# Altium PCB PCB.PcbDoc (part 4 of 4)
Units mm, origin at the board's own origin, x right, y up, seen from the top; angles counter-clockwise.
Board outline 86.25 x 140 mm, 4 copper layers (Top Layer, GND, PWR, Bottom Layer), stack 1.57 mm thick; 308 components, 255 nets, 1064 pads, 1223 vias.
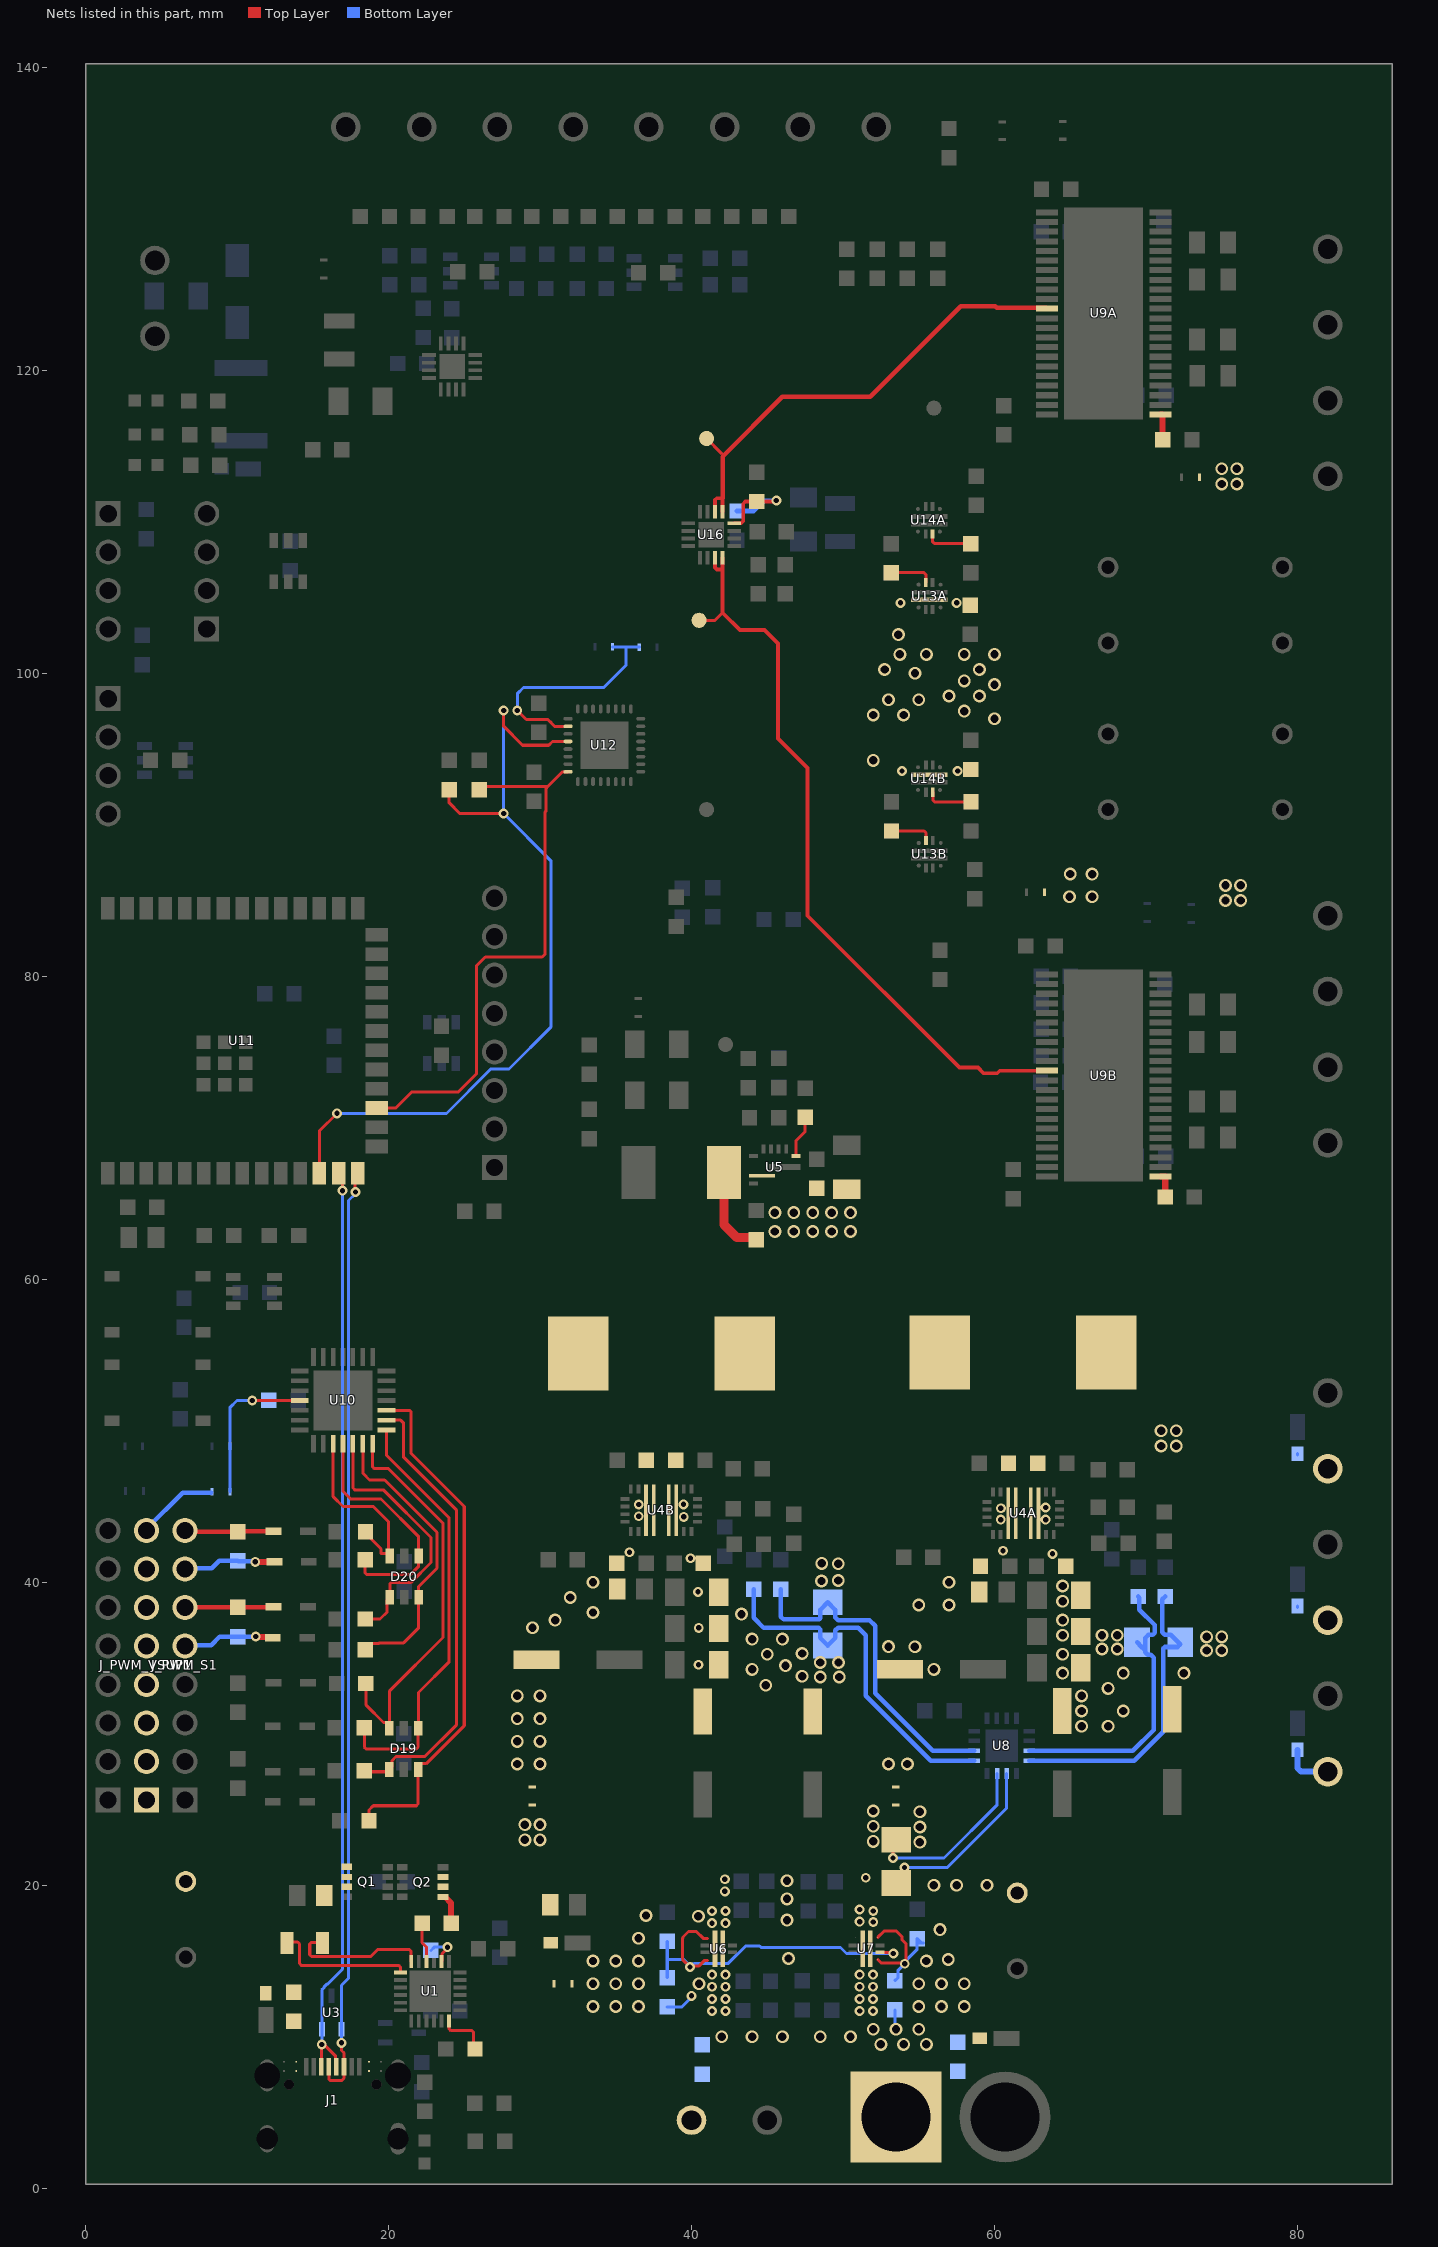
[diagram p6: the nets of this part, all layers, seen from the top]

## Via types
v1: diameter 0.85, hole 0.55, Top Layer to Bottom Layer, tented both sides, 772 vias
v2: diameter 0.65, hole 0.35, Top Layer to Bottom Layer, tented both sides, 362 vias
v3: diameter 0.65, hole 0.35, Top Layer to Bottom Layer, tented bottom, 26 vias
v4: diameter 0.7, hole 0.4, Top Layer to Bottom Layer, tented both sides, 25 vias
v5: diameter 0.65, hole 0.35, Top Layer to Bottom Layer, tented top, 19 vias
v6: diameter 0.85, hole 0.55, Top Layer to Bottom Layer, tented bottom, 14 vias
v7: diameter 5, hole 4.5, Top Layer to Bottom Layer, 4 vias
v8: diameter 0.8, hole 0.5, Top Layer to Bottom Layer, tented both sides, 1 vias

## Nets (pads, with @x,y where several pads share a name; then routed paths per layer and width w, separated by ;. In a path a pad name is that pad's centre, name@x,y a point inside that pad or via, vN(x,y) a via of type N, cw(c..) or ccw(c..) an arc to the next point about the centre after c; other vN are vias at no path point) (continued)
PWM_ETX_4: D14.K J_PWM_S1.5 R41.2 | length 6.1
  Top Layer w0.4: v2(11.232,36.418) 11.266,36.384 12.328,36.384 D14.K@12.362,36.35
  Bottom Layer w0.3: J_PWM_S1.5@6.54,35.84 8.29,35.84 8.868,36.418 R41.2@10.04,36.418 v2(11.232,36.418)
PWM_ETX_5: D13.K J_PWM_S1.6 R40.2 | length 5.9
  Top Layer w0.3: J_PWM_S1.6@6.552,38.342 12.364,38.342 D13.K@12.402,38.38
PWM_ETX_6: D12.K J_PWM_S1.7 R39.2 | length 6.2
  Top Layer w0.4: v2(11.2,41.35) D12.K@12.462,41.35
  Bottom Layer w0.3: J_PWM_S1.7@6.54,40.92 8.33,40.92 8.828,41.418 R39.2@10.04,41.418 10.074,41.384 11.166,41.384 v2(11.2,41.35)
PWM_ETX_7: D11.K J_PWM_S1.8 R38.2 | length 5.9
  Top Layer w0.3: J_PWM_S1.8@6.54,43.46 6.658,43.342 10.021,43.342 10.04,43.361 D11.K@12.402,43.361
PWM_PROT_0: D19.3 R37.1 U10.10 | length 34.6
  Top Layer w0.2: R37.1@18.712,24.25 18.712,24.962 19,25.25 21.833,25.25 21.95,25.367 21.95,27.845 22.129,28.024 22.489,28.024 25,30.534 25,45 21.5,48.5 21.5,51.233 21.383,51.35 U10.10@19.867,51.35
PWM_PROT_1: D19.1 R36.1 U10.9 | length 30.2
  Top Layer w0.2: R36.1@18.391,27.548 18.446,27.493 18.727,27.493 19.905,27.493 20.229,27.817 20.229,28.229 20.5,28.5 22.4,28.5 24.5,30.6 24.5,44.75 21,48.25 21,50.5 20.8,50.7 U10.9@19.867,50.7
PWM_PROT_2: D19.4 R35.1 U10.8 | length 28.4
  Top Layer w0.2: R35.1@18.404,30.407 18.404,29.117 18.521,29 21.833,29 21.95,29.117 21.95,30.57 21.979,30.599 21.979,32.729 24,34.75 24,44.25 19.867,48.383 U10.8@19.867,50.05
PWM_PROT_3: D19.6 R34.1 U10.7 | length 26.2
  Top Layer w0.2: R34.1@18.506,33.322 18.526,33.302 18.526,31.887 19.664,30.749 19.871,30.749 D19.6@20.05,30.57 ; U10.7@18.95,49.133 18.95,47.617 19.067,47.5 20,47.5 23.6,43.9 23.6,36.35 20.05,32.8 D19.6@20.05,30.57 ; D19.6@20.05,30.362 D19.6@20.05,30.57
PWM_PROT_4: D20.6 R33.1 U10.6 | length 19.4
  Top Layer w0.2: U10.6@18.3,49.133 18.326,49.107 18.326,47.174 18.75,46.75 19.75,46.75 23.2,43.3 23.2,40.929 21.99,39.719 D20.6@21.99,39.018 21.99,36.99 21,36 19.642,36 19.641,35.998 19.373,35.998 19.323,35.948 18.873,35.948 R33.1@18.465,35.54
PWM_PROT_5: D20.4 R32.1 U10.5 | length 17.9
  Top Layer w0.2: U10.5@17.65,49.133 17.65,46.217 17.767,46.1 19.662,46.1 22.8,42.962 22.8,41.3 21.5,40 20.207,40 20.09,39.883 D20.4@20.09,39.018 19.911,38.839 19.911,38.044 19.441,37.573 R32.1@18.469,37.573
PWM_PROT_6: D20.1 R31.1 U10.4 | length 16
  Top Layer w0.2: U10.4@17,49.133 17,46 17.5,45.5 19.5,45.5 21.99,43.01 21.99,41.056 21.434,40.5 18.58,40.5 18.462,40.617 R31.1@18.462,41.5
PWM_PROT_7: D20.3 R30.1 U10.3 | length 12.4
  Top Layer w0.2: U10.3@16.35,49.133 16.35,45.65 17,45 19,45 20,44 20,41.832 19.932,41.9 19.5,41.9 19.5,42.211 18.424,43.287 R30.1@18.479,43.342
R_LMA_IMONA: R55A.1 U13A.9 | length 2.8
  Top Layer w0.2: R55A.1@53.19,106.638 55.348,106.638 55.465,106.52 U13A.9@55.465,106
R_LMA_IMONB: R55B.1 U13B.9 | length 2.8
  Top Layer w0.2: R55B.1@53.2,89.588 55.358,89.588 55.475,89.47 U13B.9@55.475,88.95
R_LMB_IMONA: R56A.1 U14A.9 | length 3.1
  Top Layer w0.2: U14A.9@55.915,109.2 55.915,108.68 56.032,108.562 R56A.1@58.44,108.562
R_LMB_IMONB: R56B.1 U14B.9 | length 3.1
  Top Layer w0.2: U14B.9@55.925,92.15 55.925,91.63 56.042,91.512 R56B.1@58.45,91.512
R_MODE: R13.2 U5.10 | length 2.8
  Top Layer w0.2: U5.10@46.9,68.13 46.9,69.15 47.5,69.75 R13.2@47.5,70.688
REG5_R_SENS+: C12B.2 C13B.2 C14B.2 C15B.2 C16B.1 C17B.1 R8B.1 R_S1B.1 U4B.11 U8.1 | length 24.3
  Bottom Layer w0.3: R8B.1@44.1,39.55 44.1,37.65 44.766,36.984 48.399,36.984 48.5,36.883 48.5,36.325 R_S1B.1@49,35.825 49.5,36.325 49.5,36.824 49.676,37 51,37 51.5,36.5 51.5,32.517 55.787,28.229 U8.1@58.654,28.229
  other v1: 44.9,33.2 48.5,33.75 49.75,33.75 47.3,33.8 44,34.25 46.2,34.5 48.5,34.7 49.7,34.7 45,35.25 47.3,35.3 44,36.25 46,36.25 43.3,37.9
  other v2: 40.465,34.558 40.477,36.994 40.429,39.368 39.929,41.585 39.486,44.316 39.468,45.145
REG_R_SENS+: C12A.2 C13A.2 C14A.2 C15A.2 C16A.1 C17A.1 R8A.1 R_S1A.1 U4A.11 U8.11 | length 20.2
  Bottom Layer w0.3: U8.11@62.304,28.879 69.129,28.879 70.5,30.25 70.5,35.032 70.324,35.208 70.112,35.208 69.945,35.375 R_S1A.1@69.945,35.75 ; R_S1A.1@69.412,36.033 69.695,35.75 R_S1A.1@69.945,35.75 ; R8A.1@69.494,39.061 69.563,38.992 69.563,38.187 70.57,37.18 70.57,36.656 70.453,36.539 70.162,36.539 69.945,36.322 R_S1A.1@69.945,35.75 ; R_S1A.1@69.628,35.817 69.945,35.5 R_S1A.1@69.945,35.75
  other v1: 65.75,30.5 67.5,30.5 65.75,31.5 68.5,31.5 65.75,32.5 67.5,33 64.5,34 68.5,34 72.5,34 64.5,35.25 67.1,35.6 68.1,35.6 64.5,36.5 67.1,36.5 68.1,36.5 64.5,37.5 64.5,38.75 64.5,39.75
  other v2: 63.834,41.875 63.376,44.137 63.376,44.938
SW: C19.1 L_1.1 U5.6 | length 6
  Top Layer w0.6: L_1.1@42.144,67.05 42.144,63.606 43.001,62.749 44.15,62.749 C19.1@44.284,62.616
SW1A: C6A.2 L1A.1 U4A.8
SW1B: C6B.2 L1B.1 U4B.8
SW2A: C7A.2 L1A.2 U4A.10
SW2B: C7B.2 L1B.2 U4B.10
TC_ADDR: JP3.1 JP4.1 U12.26 | length 15.8
  Top Layer w0.2: v2(28.5,97.55) 29.1,96.95 30.516,96.95 30.734,96.732 30.734,96.716 30.95,96.5 U12.26@31.85,96.5
  Bottom Layer w0.2: v2(28.5,97.55) 28.5,98.65 28.914,99.064 34.214,99.064 35.675,100.525 35.675,101.75 ; JP4.1@34.8,101.75 35.675,101.75 ; JP3.1@36.55,101.725 36.55,101.75 35.675,101.75
TCA6424_nINT: R53.1 U11.17 U12.32 | length 37
  Top Layer w0.2: U11.17@19.225,71.305 20.48,71.305 21.55,72.375 24.625,72.375 25.8,73.55 25.8,80.675 26.392,81.267 30.142,81.267 30.343,81.468 30.343,90.853 30.408,90.918 30.408,92.415 30.518,92.525 ; R53.1@26,92.325 26.2,92.525 30.518,92.525 ; U12.32@31.85,93.5 31.842,93.492 31.486,93.492 30.518,92.525
TCA6424_nRESET: R54.1 U11.12 U12.28 | length 53.8
  Top Layer w0.2: U11.12@15.435,67 15.435,69.785 v2(16.6,70.95) ; R54.1@24,92.325 24,91.45 24.7,90.75 v2(27.6,90.75) ; v2(27.6,97.55) 27.6,96.501 28.851,95.25 30.574,95.25 30.824,95.5 U12.28@31.85,95.5
  Bottom Layer w0.2: v2(16.6,70.95) 23.825,70.95 26.749,73.875 27.95,73.875 30.714,76.639 30.714,87.636 v2(27.6,90.75) v2(27.6,97.55)
TPS_EXT_EN: R19.1 R21.2 U7.1 U7.4 | length 10.1
  Top Layer w0.2: U7.1@52.3,15.1 52.525,14.875 54.025,14.875 v3(54.075,14.825) 54.152,14.902 54.152,16.148 53.897,16.403 53.897,16.607 53.531,16.973 52.709,16.973 52.3,16.565 U7.4@52.3,16.55
  Bottom Layer w0.2: R19.1@53.425,13.7 53.641,13.916 53.641,14.391 v3(54.075,14.825) 54.075,14.947 54.899,15.771 R21.2@54.899,16.18 ; R21.2@54.899,16.18 R21.2@54.899,16.483 R21.2@55.203,16.18 ; R21.2@54.899,16.18 R21.2@55.203,16.18 ; R21.2@55.203,16.18 55.309,16.18 R21.2@55.203,16.18
USB_D_N: J1.A7 J1.B7 U3.2 U11.13 | length 61.6
  Top Layer w0.2: J1.B7@15.563,8.027 15.592,8.057 v2(15.592,9.492) 15.679,9.406 15.831,9.406 16.515,8.723 16.515,8.075 J1.A7@16.563,8.027 ; U11.13@16.705,67 16.964,66.741 v2(16.964,65.851)
  Bottom Layer w0.2: v2(15.592,9.492) 15.596,9.496 U3.2@15.596,10.5 ; U3.2@15.6,10.5 15.6,13.1 15.75,13.25 15.75,13.299 15.926,13.475 15.975,13.475 16.964,14.464 v2(16.964,65.851)
USB_D_P: J1.A6 J1.B6 U3.1 U11.14 | length 62.2
  Top Layer w0.2: J1.A6@16.063,8.027 16.063,7.217 16.18,7.1 16.893,7.1 17.063,7.27 J1.B6@17.063,8.027 17.063,8.937 16.9,9.1 v2(16.9,9.6) ; v2@17.798,65.756 17.798,66.823 U11.14@17.975,67
  Bottom Layer w0.2: v2(16.9,9.6) U3.1@16.9,10.5 16.9,13.4 17.364,13.864 17.364,65.2 17.798,65.634 v2@17.798,65.756
  other v2: 17.823,65.756
V5V: C3.2 U1.20 | length 2.3
  Top Layer w0.2: U1.20@23.5,14.965 23.527,14.993 23.527,15.473 23.9,15.846 v2(23.9,15.919)
  Bottom Layer w0.2: C3.2@22.8,15.7 23.019,15.919 v2(23.9,15.919)
V18: C4.2 U1.12 | length 3.4
  Top Layer w0.2: U1.12@24,11.035 24,10.517 24.117,10.4 25.508,10.4 25.625,10.283 25.625,9.278 C4.2@25.707,9.196
V_BUS_OUT: C2.2 D1.K OUT_PD1.1 Q2.1 Q2.2 Q2.3 R1.2 | length 2
  Top Layer w0.4: Q2.1@23.6,19.225 23.74,19.225 24.139,18.826 R1.2@24.139,17.499
V_UVLO: R14.1 R15.2 U6.1 U6.4 U7.2 | length 24.7
  Top Layer w0.2: U6.4@41.05,15.05 40.872,15.05 40.508,14.686 39.986,14.686 v3(39.9,14.6) 39.9,14.614 39.394,15.12 39.394,16.477 39.435,16.518 39.435,16.584 39.801,16.95 40.319,16.95 40.769,16.5 U6.1@41.05,16.5 ; U7.2@52.45,15.575 52.625,15.575 52.65,15.55 53.275,15.55 v2(53.325,15.5)
  Bottom Layer w0.2: R14.1@38.4,13.9 38.4,15.1 ; R15.2@38.4,16.3 38.4,15.1 ; v3(39.9,14.6) 39.9,14.7 39.5,15.1 38.4,15.1 ; v3@39.952,14.648 40.154,14.851 42.434,14.851 43.559,15.977 44.087,15.977 44.099,15.988 44.501,15.988 44.592,15.897 49.831,15.897 50.228,15.5 v2(53.325,15.5)
VBUS: F_USB1.1 J1.A4 J1.A9 J1.B4 J1.B9
VBUS_PROT: D2.K F_USB1.2 R_SUSB1.1 U1.1 | length 9.3
  Top Layer w0.2: R_SUSB1.1@13.3,16.2 13.35,16.25 14.006,16.25 14.124,16.133 14.124,14.832 14.241,14.715 20.668,14.715 20.785,14.598 U1.1@20.785,14.25
VBUS_SEN: C1.1 Q1.1 Q1.2 Q1.3 R_SUSB1.2 U1.24 | length 9.3
  Top Layer w0.2: R_SUSB1.2@15.65,16.2 15.615,16.235 14.919,16.235 14.802,16.118 14.802,15.419 14.919,15.302 18.831,15.302 19.279,15.75 21.383,15.75 21.5,15.633 U1.24@21.5,14.965
VCPA: C33A.1 U9A.1 | length 1.8
  Top Layer w0.4: U9A.1@70.95,117.083 71.075,117.083 71.075,115.461 C33A.1@71.109,115.428
VCPB: C33B.1 U9B.1 | length 1.7
  Top Layer w0.4: U9B.1@70.95,66.783 71.269,66.783 C33B.1@71.269,65.431
VDD: C39.2 PWM_1.2 PWM_REG1.2 U10.25 | length 11.5
  Top Layer w0.2: v2(11.004,52.004) 11.005,52.002 14.131,52.002 U10.25@14.133,52
  Bottom Layer w0.2: PWM_REG1.2@9.525,45.975 9.525,51.525 10.004,52.004 v2(11.004,52.004) C39.2@12.106,52.004
VEXT_PROT: D7.K F_ST1.2 F_XT1.2 R19.2 U7.5 | length 1.3
  Bottom Layer w0.2: v1@53.425,10.5 R19.2@53.425,11.775
  other v1: 52.5,9.5 54,9.5 55.5,9.5 42,10 44,10 46,10 48.5,10 50.5,10 52,10.5 53.5,10.5 55,10.5 55,12 56.5,12 58,12 55,13.5 56.5,13.5 58,13.5 55.5,15 56.95,15.1 56.4,17.075
  other v2: 51.975,11.7 51.975,12.5 51.975,13.3 51.975,14.1 52,17.575 52,18.3
VEXT_SCR: F_ST1.1 J_EXT_2.1
VEXT_XT: F_XT1.1 J_EXT_1.1
VOUT: R1.1 U1.22 | length 2.7
  Top Layer w0.2: R1.1@22.215,17.499 22.215,16.212 22.5,15.927 U1.22@22.5,14.965
VREF: C67.2 R74.1 U16.16 | length 7
  Top Layer w0.25: U16.16@42.821,109.9 42.823,109.903 43.272,109.903 43.419,110.049 43.419,111.191 43.565,111.338 C67.2@44.304,111.338 45.538,111.338 v3(45.6,111.4)
  Bottom Layer w0.3: R74.1@43,110.712 44.112,110.712 44.8,111.4 v3(45.6,111.4)
VREF1: TP2.1 U9A.33 U16.1 U16.2 | length 31.9
  Top Layer w0.2: TP2.1@41,115.5 42,114.5
  Top Layer w0.25: U16.2@41.55,110.671 41.55,111.433 41.667,111.55 42.05,111.55 U16.1@42.05,110.671
  Top Layer w0.3: 42.05,111.55 42.05,114.3 46,118.25 51.8,118.25 57.775,124.225 60.05,124.225 60.157,124.118 63.4,124.118 U9A.33@63.45,124.068
VREF2: TP3.1 U9B.33 U16.11 U16.12 | length 50
  Top Layer w0.2: TP3.1@40.5,103.5 41.55,103.5 42.05,104
  Top Layer w0.25: U16.11@41.55,107.629 41.55,106.982 41.682,106.85 42.05,106.85 ; U16.12@42.05,107.629 42.05,106.85 ; U9B.33@63.45,73.768 60.347,73.768 60.179,73.6 59.279,73.6 58.908,73.971 57.68,73.971 47.652,83.998 47.652,93.75 45.702,95.699 45.702,101.972 44.824,102.85 43.2,102.85 42.05,104 42.05,106.85
VREG: D10.K J_VREG2.1 JP6.1 R9A.1 R_S1A.2 U8.12 | length 20.6
  Bottom Layer w0.2: D10.K@80,38.335 D10.K@80,38.435 ; J_VREG2.1@81.89,37.61 J_VREG2.1@82,37.5
  Bottom Layer w0.3: U8.12@62.304,28.229 69.229,28.229 71.134,30.134 71.134,35.634 71.229,35.729 72.083,35.729 72.262,35.908 71.631,36.539 71.229,36.539 71.072,36.696 71.072,38.868 R9A.1@71.266,39.062
  other v1: 74,35.5 75,35.5 74,36.4 75,36.4 75.25,85 76.25,85 75.25,86 76.25,86 75,112.5 76,112.5 75,113.5 76,113.5
VREG5: C42.1 D8.K J_PWM_VSUP1.1 J_PWM_VSUP1.2 J_PWM_VSUP1.3 J_PWM_VSUP1.4 J_PWM_VSUP1.5 J_PWM_VSUP1.6 J_PWM_VSUP1.7 J_PWM_VSUP1.8 J_VREG1.1 JP7.1 PWM_REG1.1 R9B.1 R_S1B.2 U8.2 | length 28.1
  Bottom Layer w0.2: D8.K@80,48.388 D8.K@80,48.488 ; J_VREG1.1@81.837,47.663 J_VREG1.1@82,47.5
  Bottom Layer w0.3: J_PWM_VSUP1.8@4.022,43.415 4.022,43.522 6.417,45.917 PWM_REG1.1@8.3,45.917 ; R9B.1@45.9,39.55 45.9,37.724 46.076,37.548 48.431,37.548 48.5,37.617 48.5,38.175 R_S1B.2@49,38.675 49.5,38.175 49.5,37.676 49.676,37.5 51.75,37.5 52.125,37.125 52.125,32.666 55.917,28.874 56.9,28.874 56.905,28.879 U8.2@58.654,28.879
  other v1: 48.579,40.08 49.684,40.115 49.685,41.224 48.6,41.25 71,49 72,49 71,50 72,50 64.946,85.246 66.446,85.246 65,86.75 66.446,86.746
VSUP: C21.2 C22.2 C54A.2 C57B.2 D9.K EN_VREG1.1 EN_VREG2.1 J_SUP1.1 R_S2.2 U5.8 U8.15 U13A.5 U14B.5 | length 15
  Top Layer w0.2: v2(53.295,21.8) 53.295,22.795 R_S2.2@53.5,23
  Bottom Layer w0.2: v2(53.295,21.8) 56.669,21.8 60.179,25.31 U8.15@60.179,27.379
  Bottom Layer w0.4: D9.K@80,28.935 80,27.734 80.234,27.5 J_SUP1.1@82,27.5
  other v1: 55.075,22.85 52,22.9 29,23 30,23 55.075,23.85 52,23.9 29,24 30,24 55.075,24.85 52,24.9 45.5,63.15 46.75,63.15 48,63.15 49.25,63.15 50.5,63.15 45.5,64.4 46.75,64.4 48,64.4 49.25,64.4 50.5,64.4 52,94.25 60,97 52,97.25 54,97.25 58,97.5 53,98.25 55,98.25 57,98.5 59,98.5 60,99.25 58,99.5 54.75,100 52.75,100.25 59,100.25 53.75,101.25 55.5,101.25 58,101.25 60,101.25 53.652,102.552
  other v2: 53.891,93.545 57.566,93.545 53.8,104.65 57.5,104.65
VSUP_SENS+: C25.1 R_S2.1 U6.6 U7.6 U8.14 | length 11.9
  Top Layer w0.2: R_S2.1@53.5,20.15 54.058,20.708 v2(54.058,21.175)
  Bottom Layer w0.2: v2(54.058,21.175) 56.881,21.175 60.804,25.098 U8.14@60.804,27.379
  other v1: 46.4,15.172 46.3,17.7 46.3,19.1 56,20 57.5,20 59.5,20 46.3,20.3
  other v2: 42.25,11.7 51.1,11.7 42.25,12.5 51.1,12.5 42.25,13.3 51.1,13.3 42.25,14.1 51.1,14.1 42.25,17.5 51.1,17.6 42.25,18.3 51.1,18.4 42.2,19.6 42.2,20.4 51.5,20.5
VSUPA: C8A.1 C9A.2 C10A.2 EN_VREG1.2 U4A.7
  other v1: 53,28 54.25,28 56,34.25 53,35.75 54.746,35.746 55,38.5 57,38.5 57,40
  other v2: 60.56,42.083 60.41,44.137 60.419,44.884
VSUPB: C8B.1 C9B.2 C10B.2 EN_VREG2.2 U4B.7
  other v1: 28.5,28 30,28 28.5,29.5 30,29.5 28.5,31 30,31 28.5,32.5 30,32.5 29.5,37 31,37.5 33.5,38 32,39 33.5,40
  other v2: 35.901,41.987 36.518,44.361 36.515,45.132
VUSB: OUT_PD1.2 R14.2 U6.5 | length 2
  Bottom Layer w0.2: R14.2@38.4,11.975 39.375,11.975 40,12.6 v2(40,12.7)
  other v1: 33.5,12 35,12 36.5,12 33.5,13.5 35,13.5 36.5,13.5 40.5,13.5 33.5,15 35,15 36.5,15 36.5,16.5 40.45,17.957 37,18
  other v2: 41.35,11.7 41.35,12.5 41.35,13.3 41.35,14.1 41.35,17.5 41.35,18.3
pads on no net: J1.21 J1.22 U1.2 U1.7 U1.10 U1.11 U1.14 U1.21 U13A.10 U13B.10 U14A.10 U14B.10 U16.3 U16.4 U16.9 U16.10
copper on no net:
  other v1: 62.5,25

## Polygon pours and split planes (outlines as drawn)
GND on Bottom Layer "NONET_L02_P-001" (solid, remove dead copper, pour order 389): 0.25,140 86,140 86,0.5 0.25,0.5
VREG5 on Bottom Layer "NONET_L02_P-001" (solid, pour order 377): 83.75,46.09 79.41,46.09 77.25,48.25 70.25,48.25 70.25,50.75 77.75,50.75 79.5,49 83.75,49
VREG on Bottom Layer "NONET_L02_P-001" (solid, pour order 374): 82.963,35.063 83.7,35.8 83.7,38.1 82.9,38.9 79.367,38.9 78.9,38.3 77.5,36.9 71.5,37 71.5,35.063
VEXT_SCR on Bottom Layer "NONET_L02_P-001" (solid, pour order 340): 38.2,0.6 41.9,0.6 41.9,8 38.2,8
GND on Bottom Layer "NONET_L02_P-001" (solid, pour order 290): 64.5,132.8 64.5,116.8 69.894,116.8 69.894,132.8
GND on Bottom Layer "NONET_L02_P-001" (solid, pour order 203): 64.5,82.5 64.5,66.5 69.894,66.5 69.894,82.5
GND on Bottom Layer "NONET_L02_P-001" (solid, pour order 4): 21.2,122.4 21.2,119.65 19.95,119.65 19.95,117.15 23.7,117.15 24.7,118.15 26.2,118.15 26.2,122.4
VEXT_XT on Bottom Layer "NONET_L02_P-001" (solid, pour order 347): 58.1,0.75 58.1,8.25 49.5,8.25 49.5,0.75
VREG on Bottom Layer "NONET_L02_P-001" (solid, pour order 300): 74.5,114.5 74.5,84.25 77,84.25 77,114.5
REG_R_SENS+ on Bottom Layer "NONET_L02_P-001" (solid, pour order 373): 70.2,37 66.5,37 66.5,35 70.2,35
VREG5 on Bottom Layer "NONET_L02_P-001" (solid, pour order 196): 50.6,37.85 50.6,42 47.6,42 47.6,37.85
REG5_R_SENS+ on Bottom Layer "NONET_L02_P-001" (solid, pour order 197): 46.5,36.65 46.5,33.35 50.6,33.35 50.6,36.65
VEXT_PROT on Bottom Layer "NONET_L02_P-001" (solid, pour order 360): 38.2,8.9 38.3,8.9 59.6,8.9 59.6,10.8 38.2,10.8
DVR_2_VM on PWR "NONET_L02_P-001" (solid, pour order 321): 74,90 80.25,90 80.25,93 49.25,93 49.25,88.169 70.25,88.169 70.25,64.5 74,64.5
DVR_1_VM on PWR "NONET_L02_P-001" (solid, pour order 242): 74.5,130.5 74.5,130.25 74.5,118.5 80.5,112.5 80.5,105.15 47.75,105.15 47.75,110.05 67.5,110.05 67.55,110 73,110 73,115.5 71,115.5 71,130.5
3V5 on PWR "PWR-3V5" (solid, pour order 299): 47.5,115.5 62.75,115.5 62.75,140.25 6.25,140.25 6.25,88.5 0,88.5 0,60.75 0.204,60.75 0.204,51.546 0.204,45.95 19.5,45.95 19.5,59 38.25,59 38.25,99.25 42.5,103.5 47.5,103.5
VSUP on PWR "PWR-VSUP" (solid, pour order 249): 51.25,62.25 51.25,65 50.25,65 48.5,66.75 48.5,93.15 60.5,93.15 64.5,97 79.5,97 79.5,25.825 27.5,25.825 27.5,21.275 52.525,21.275 52.525,22.175 54.475,22.175 54.475,21.275 86,21.275 86,101.074 64.987,101.074 60.5,105 49.625,105 44.625,100 44.625,62.25
3V3PROT on PWR "NONET_L02_P-001" (solid, pour order 184): 0,129.45 0,88.75 6,88.75 6,129.45
VEXT_PROT on PWR "PWR-VEXT_PROT" (solid, pour order 363): 38.2,8.9 61.625,8.9 61.625,15.518 58.25,15.518 57.85,15.918 57.85,17.618 56.768,18.7 51.65,18.7 51.65,16.718 51.65,10.8 38.2,10.8
VREG5 on PWR "PWR-VREG5" (solid, pour order 319): 24,39.5 26.5,42 26.5,50.25 47.9,50.25 47.9,38.25 51.6,38.25 51.6,50.25 69,50.25 70,49.25 70,47.75 72.75,47.75 72.75,57.417 68.5,60.25 68.5,86.75 63.5,86.75 63.5,60.25 61.25,58 20.5,58 20.5,45 2.5,45 2.5,18.5 8.5,18.5 8.5,39.5
VBUS on PWR "NONET_L02_P-001" (solid, pour order 100): 16.2,12.15 16.2,0.55 27.6,0.55 27.6,12.15
VREG on PWR "PWR-VREG" (solid, pour order 241): 74,34 79.1,34 79.1,88.5 74,88.5
MuxInBA on PWR "NONET_L02_P-001" (solid, pour order 246): 47.75,110.25 47.75,115 72.677,115 72.677,110.25
VSUPA on PWR "NONET_L02_P-001" (solid, pour order 322): 57.3,26 57.3,34.75 60.2,38.55 60.2,41.55 60.5,41.75 61.1,42.35 61.1,46.45 59.2,46.45 59.2,42.55 58.1,42.55 57.5,41.55 56.9,40.55 52.1,40.55 52.1,26
REG_R_SENS+ on PWR "NONET_L02_P-001" (solid, pour order 323): 62.2,46.45 62.2,42.65 63.3,41.55 63.5,41.55 63.5,29.15 73.2,29.15 73.2,34.65 73.2,40.05 66.9,40.05 64.1,42.85 64.1,46.45
REG5_R_SENS+ on PWR "NONET_L02_P-001" (solid, pour order 313): 38.75,46.5 38.75,42.5 39.6,41.5 39.6,32.25 50.6,32.25 50.6,37.8 45.7,37.8 40.5,43 40.5,46.5
VSUPB on PWR "NONET_L02_P-001" (solid, pour order 365): 31.2,26 31.2,33.575 35.9,38.8 36.45,41.6 37.3,42.6 37.3,46.6 35.55,46.6 35.55,43.8 31.693,40.693 27.4,36.4 27.4,26
VSUP_SENS+ on PWR "PWR-VSUP_SENS+" (solid, pour order 356): 51.442,18.866 57.666,18.866 57.8,18.8 59,17.6 67,17.6 67,21.014 41.9,21.014 41.9,16.714 42.197,16.714 42.197,17 42.581,17.394 44.15,17.414 44.8,16.764 44.8,14.864 44.35,14.414 42.4,14.414 42.197,14.605 42.2,16.714 41.9,16.71 41.9,10.914 51.442,10.914 51.442,16.714 51.15,16.714 51.15,14.614 50.85,14.414 48.45,14.418 48.45,17.352 50.897,17.349 51.15,17 51.15,16.714 51.442,16.718
VUSB on PWR "PWR-VUSB" (solid, pour order 346): 35.5,15.9 35.1,15.5 31.725,15.5 31.725,10.9 41.7,10.9 41.7,14.9 41.4,14.9 41.4,14.6 41,14.2 39.7,14.2 39.2,14.7 39.2,16.9 39.5,17.2 41.2,17.2 41.4,17 41.4,16.7 41.7,16.7 41.7,18.7 36.6,18.7 35.5,17.6
MuxInAB on PWR "NONET_L02_P-001" (solid, pour order 244): 49.248,88 49.248,82.25 62.5,82.25 62.5,88
DVR_1_VM on Top Layer "Top Layer-DVR_1_VM 1" (solid, pour order 254): 80.5,109 65,109 64,110 56.6,110 56.6,109.89 57.24,109.25 59.09,109.25 59.09,105.95 57.24,105.95 56.6,105.31 56.6,105.2 80.5,105.2
GND on Top Layer "Top Layer-GND 1" (solid, remove dead copper, pour order 391): 4.2,119.275 4.725,119.8 9.525,119.8 9.525,121.875 9.546,121.909 15.87,125.025 58.975,125.025 58.975,58.2 59,58.088 59,53.5 65,53.5 65,58.2 69.7,58.2 69.7,47.682 70.382,47 72.216,47 72.216,43 62.065,43 62.065,43.375 61.735,43.375 61.735,43 61.25,43 60.314,41.695 56,33.731 56,21.25 67.25,21.25 67.25,17.25 59.75,17.25 59.75,10.75 27,10.75 26.25,10.25 26.25,8.8 19.409,8.8 19.208,8.599 19.208,6 13.417,6 13.417,8.599 12.4,9.7 12.4,12 11.5,12 10.9,12.6 10.9,17.4 11.6,18.1 14.5,18.1 14.5,23.5 2.75,23.5 2.75,60.75 0.3,60.75 0.3,0.7 43,0.7 43,8.44 64.25,8.44 64.25,0.5 86,0.5 86,140 0.25,140 0.25,112.5 4.2,112.5
GND on Top Layer "NONET_L02_P-001" (solid, pour order 369): 38.165,42.89 38.165,43.575 37.835,43.575 37.835,42.89 25.25,42.89 25.25,21 30.5,21 31.5,20 31.5,15.75 35,15.75 35.25,16 35.25,18 36.25,19 41.5,19 41.5,21.25 51.15,21.25 51.15,26.25 51.75,26.25 51.75,30 39.5,30 39.5,42.89
VSUP on Top Layer "NONET_L02_P-001" (solid, pour order 367): 55.7,22.297 51.375,22.297 51.375,25.5 51.5,25.5 55.7,25.5
VREG on Top Layer "NONET_L02_P-001" (solid, pour order 274): 73.229,111.998 76.9,111.998 76.9,114 73.229,114
VREG5 on Top Layer "NONET_L02_P-001" (solid, pour order 273): 63,84.825 63,84.25 67.25,84.25 67.25,87.462 63,87.462
3V5 on Top Layer "NONET_L02_P-001" (solid, pour order 272): 35.75,77.9 35.3,77.9 35.3,81 37.7,81 37.7,77.9 37.25,77.9 37.25,78.45 35.75,78.45
MuxInBA on Top Layer "Top Layer-MuxInBA" (solid, pour order 271): 72.722,114 65.5,114 64.5,115 49.354,115 49.354,110.2 54.59,110.2 54.59,110.5 54.14,110.95 54.14,113.26 54.39,113.51 57.24,113.51 57.24,110.95 56.79,110.5 56.79,110.2 59.09,110.2 59.09,110.21 64,110.21 65.761,111.971 72.722,111.971
MuxInAB on Top Layer "Top Layer-MuxInAB" (solid, pour order 270): 51.5,82.716 49.25,84.75 49.25,88 49.3,87.95 54.6,87.95 54.6,87.65 54.15,87.2 54.15,84.89 54.4,84.64 57.25,84.64 57.25,87.2 56.8,87.65 56.8,87.95 62.5,87.95 62.5,82.716
VSUP on Top Layer "NONET_L02_P-001" (solid, pour order 168): 27.5,25.599 27.5,22 31.175,22 31.175,25.599
VSUPA on Top Layer "NONET_L02_P-001" (solid, pour order 164): 61.049,42.909 61.053,42.4 60.314,41.695 60.198,41.038 60.111,40.544 59.798,38.538 55.7,32.473 55.7,26.099 52.1,26.099 52.1,40.544 57.065,40.544 58.1,42.25 60.425,42.553 60.621,42.6 60.78,42.909
VSUPB on Top Layer "NONET_L02_P-001" (solid, pour order 152): 32.767,40.25 34.667,42.286 36.524,42.746 36.684,42.866 36.827,43.05 37.173,43.05 37.176,42.633 36.416,41.907 36.3,41.25 36.213,40.756 35.917,38.861 31.175,33.04 31.175,25.825 30.249,25.85 29.75,26.25 29,26.25 28.749,25.85 27.836,25.85 27.5,25.85 27.5,36.525 31.225,40.25
3V5_OUT on Top Layer "NONET_L02_P-001" (solid, pour order 71): 37.6,65.3 37.7,65.4 37.7,77.5 35.3,77.5 35.3,65.3
V_BUS_OUT on Top Layer "NONET_L02_P-001" (solid, pour order 338): 23.2,18.8 27.9,18.8 29.2,17.5 29.2,10.9 31.2,10.9 31.2,19.72 29.85,20.8 25.4,20.8 23.2,20.8
VBUS_PROT on Top Layer "NONET_L02_P-001" (solid, pour order 336): 13.723,16.915 12.115,16.915 11.5,16.3 11.5,12.374 14.4,12.374 14.4,14.5 13.723,14.5
DVR_2_VM on Top Layer "NONET_L02_P-001" (solid, pour order 286): 70.2,67.65 71.7,67.65 72.425,68.375 72.4,68.35 73.7,68.35 73.7,64.85 72.425,64.85 72.425,67.15 70.2,67.15
DVR_1_VM on Top Layer "NONET_L02_P-001" (solid, pour order 280): 70.2,117.95 71.7,117.95 72.425,118.675 72.4,118.65 73.7,118.65 73.7,114.75 72.3,114.75 72.3,117.45 70.2,117.45
VSUP on Top Layer "Top Layer-VSUP" (solid, pour order 267): 49.325,93.15 54.6,93.15 54.6,93.45 54.15,93.9 54.15,96.75 57.24,96.75 57.24,93.897 56.79,93.447 56.79,93.147 59.09,93.147 59.09,93.15 60.5,93.15 60.5,105 56.79,105 56.79,104.7 57.24,104.25 57.24,101.75 54.15,101.75 54.15,104.25 54.14,104.25 54.59,104.7 54.59,105 49.325,105
DVR_2_VM on Top Layer "Top Layer-DVR_2_VM" (solid, pour order 260): 80.5,90 64.224,90 62.383,88.15 56.8,88.15 56.8,88.45 57.25,88.9 59.1,88.9 59.1,92.2 57.25,92.2 56.8,92.65 56.8,92.95 59.1,92.95 80.5,92.95
DVR_2_VM on Top Layer "Top Layer-DVR_2_VM 1" (solid, pour order 259): 49.2,88.15 54.6,88.15 54.6,88.45 54.15,88.9 52.3,88.9 52.3,92.2 54.15,92.2 54.6,92.65 54.6,92.95 52.3,92.95 49.2,92.95
DVR_1_VM on Top Layer "Top Layer-DVR_1_VM" (solid, pour order 256): 49.331,105.2 54.7,105.2 54.7,105.39 54.14,105.95 52.29,105.95 52.29,109.25 54.14,109.25 54.7,109.81 54.7,110 52.29,110 49.331,110
REG_R_SENS+ on Top Layer "NONET_L02_P-001" (solid, pour order 206): 73.25,37.5 70.5,37.5 68,39.95 66.427,39.95 65.206,41.556 64.681,41.606 64.431,41.631 64.225,42.125 63.529,42.522 63.06,42.881 62.76,42.881 62.76,42.353 63.446,41.667 63.446,40.717 63.7,40.463 63.7,29.231 73.25,29.231
REG5_R_SENS+ on Top Layer "NONET_L02_P-001" (solid, pour order 154): 38.825,43.1 38.825,42.475 39.575,41.625 39.775,40.15 39.775,30.565 50.604,30.565 50.625,32.725 50.623,37.825 44.343,37.825 41.3,41.775 40.025,42.3 39.359,42.809 39.15,43.1
GND on Top Layer "Top Layer-GND" (solid, pour order 70): 51.225,76.219 49.444,78 38.3,78 38.3,69.65 41.5,69.65 41.5,76.15 48.5,76.15 48.5,69.175 47.55,69.175 47.55,67.6 45.729,67.6 45.979,66.9 51.225,66.9
VEXT_PROT on Top Layer "Top Layer-VEXT_PROT" (solid, pour order 349): 57.85,15.918 58.25,15.518 59.5,15.518 59.5,8.9 51.65,8.9 51.65,16.718 51.95,16.718 51.95,14.618 52.35,14.218 53.65,14.218 54.3,14.868 54.3,16.768 53.85,17.218 52.15,17.218 51.95,17.018 51.95,16.718 51.65,16.718 51.65,18.7 56.768,18.7 57.85,17.618
VBUS on Top Layer "NONET_L02_P-001" (solid, pour order 334): 14.217,9.967 14.75,10.5 18,10.5 18.408,10.092 18.408,7.456 19.017,7.456 19.017,8.813 19.202,8.998 19.5,9.295 19.5,11.758 13,11.758 13,9.42 13.608,8.813 13.608,7.456 14.217,7.456 14.217,8.599
VSUP on Top Layer "NONET_L02_P-001" (solid, pour order 62): 45,62.75 45,66.448 51.25,66.448 51.25,62.75
REG5_R_SENS+ on Top Layer "NONET_L02_P-001" (solid, pour order 371): 39,43.538 39.825,44.098 39.825,45.373 39,45.962
VSUPB on Top Layer "NONET_L02_P-001" (solid, pour order 370): 37,45.96 36.175,45.4 36.175,44.125 37,43.536
VSUP_SENS+ on Top Layer "Top Layer-VSUP_SENS+" (solid, pour order 357): 51.442,18.866 57.666,18.866 57.8,18.8 59,17.6 67,17.6 67,21.014 41.9,21.014 41.9,16.714 42.197,16.714 42.197,17 42.581,17.394 44.15,17.414 44.8,16.764 44.8,14.864 44.35,14.414 42.4,14.414 42.197,14.605 42.2,16.714 41.9,16.71 41.9,10.914 51.442,10.914 51.442,16.714 51.15,16.714 51.15,14.614 50.85,14.414 48.45,14.418 48.45,17.352 50.897,17.349 51.15,17 51.15,16.714 51.442,16.718
VBUS_SEN on Top Layer "NONET_L02_P-001" (solid, pour order 335): 17.602,19.7 17.602,21.428 16.128,21.428 15.228,20.528 15.228,15.47 16.8,15.47 16.8,15.6 16.8,19.7
REG_R_SENS+ on Top Layer "NONET_L02_P-001" (solid, pour order 162): 62.898,43.326 63.723,43.886 63.723,45.161 62.898,45.75
VSUPA on Top Layer "NONET_L02_P-001" (solid, pour order 161): 60.898,45.748 60.073,45.188 60.073,43.913 60.898,43.324
DVR_2_VM on Top Layer "NONET_L02_P-001" (solid, pour order 285): 72.1,74.157 72.001,74.058 70.205,74.058 70.205,72.848 71.798,72.848 71.996,72.65 73.1,72.65 73.3,72.85 73.3,74.35 73.1,74.55 72.3,74.55 72.1,74.35
DVR_1_VM on Top Layer "NONET_L02_P-001" (solid, pour order 279): 72.1,124.457 72.001,124.358 70.205,124.358 70.205,123.148 71.798,123.148 71.996,122.95 73.1,122.95 73.3,123.15 73.3,124.65 73.1,124.85 72.3,124.85 72.1,124.65
SW on Top Layer "NONET_L02_P-001" (solid, pour order 66): 45.475,66.725 43.025,66.725 43.025,67.65 44.375,67.65 44.375,67.4 44.825,66.95 45.475,66.95
C_BOOT on Top Layer "C_boot " (solid, pour order 65): 43.8,66.313 43.8,65 44.4,65 44.4,66.313
SW2B on Top Layer "NONET_L02_P-001" (solid, pour order 147): 45.494,53.65 45.494,51.65 42.994,51.65 39.494,48.15 39.494,47.35 38.522,46.35 38.375,46.35 38.375,53.05 40.894,53.05 41.494,53.65
SW2A on Top Layer "NONET_L02_P-001" (solid, pour order 160): 69.393,53.438 69.393,51.438 66.893,51.438 63.393,47.938 63.393,47.138 62.518,46.238 62.273,46.238 62.273,52.838 64.793,52.838 65.393,53.438
SW1A on Top Layer "NONET_L02_P-001" (solid, pour order 159): 54.398,53.438 54.398,51.438 56.898,51.438 60.398,47.938 60.398,47.138 61.273,46.238 61.518,46.238 61.518,52.838 58.998,52.838 58.398,53.438
GND on Top Layer "NONET_L02_P-001" (solid, pour order 187): 61.735,45.725 61.735,48.4 62.062,48.4 62.062,45.725
VUSB on Top Layer "Top Layer-VUSB" (solid, pour order 358): 35.5,15.9 35.1,15.5 31.725,15.5 31.725,10.9 41.7,10.9 41.7,14.9 41.4,14.9 41.4,14.6 41,14.2 39.7,14.2 39.2,14.7 39.2,16.9 39.5,17.2 41.2,17.2 41.4,17 41.4,16.7 41.7,16.7 41.7,18.7 36.6,18.7 35.5,17.6
SW1B on Top Layer "NONET_L02_P-001" (solid, pour order 146): 30.5,53.65 30.5,51.65 33,51.65 36.5,48.15 36.5,47.35 37.472,46.35 37.619,46.35 37.619,53.05 35.1,53.05 34.5,53.65
GND on Top Layer "NONET_L02_P-001" (solid, pour order 293): 6.5,76.95 6.5,71.65 11.8,71.65 11.8,76.95
OUT3B on Top Layer "Top Layer-OUT3_U_PowerIO_2" (solid, pour order 284): 70.2,76.75 73.869,76.75 73.869,78.415 73.881,78.426 73.881,78.89 72.681,78.89 72.205,78.415 70.2,78.415
OUT4B on Top Layer "NONET_L02_P-001" (solid, pour order 283): 70.2,74.85 73.869,74.85 73.869,76.515 70.2,76.515
OUT2B on Top Layer "Top Layer-OUT2_U_PowerIO_2" (solid, pour order 282): 70.219,70.41 73.9,70.41 73.9,72.086 73.9,72.45 72.6,72.45 72.224,72.074 70.219,72.074
OUT1B on Top Layer "NONET_L02_P-001" (solid, pour order 281): 70.231,68.485 73.9,68.485 73.9,70.15 70.231,70.15
OUT3A on Top Layer "Top Layer-OUT3_U_PowerIO_2" (solid, pour order 278): 70.2,127.05 73.869,127.05 73.869,128.715 73.881,128.726 73.881,129.19 72.681,129.19 72.205,128.715 70.2,128.715
OUT4A on Top Layer "NONET_L02_P-001" (solid, pour order 277): 70.2,125.15 73.869,125.15 73.869,126.815 70.2,126.815
OUT2A on Top Layer "Top Layer-OUT2_U_PowerIO_2" (solid, pour order 276): 70.219,120.71 73.9,120.71 73.9,122.386 73.9,122.75 72.6,122.75 72.224,122.374 70.219,122.374
OUT1A on Top Layer "NONET_L02_P-001" (solid, pour order 275): 70.231,118.785 73.9,118.785 73.9,120.45 70.231,120.45
GND on Top Layer "NONET_L02_P-001" (solid, pour order 150): 37.836,45.9 37.836,48.575 38.164,48.575 38.164,45.9
GND on GND "NONET_L02_P-001" (solid, pour order 141): 0.25,0.5 0.25,140 85.75,140 85.75,0.5

## Keep-outs
Keep-Out Layer:
  the board outline again, w0.4

## Other copper
Top Layer:
  rectangle net NMOS: 19.125,19.025 21.775,21.4
  pour cut-out: 49.6,124.312 49.6,128.666 51.215,130.575 57.45,130.575 57.45,124.34
  pour cut-out: 65.387,135.875 65.4,135.888 65.4,137 63.536,137 63.516,135.875
GND:
  region net GND: 42,75.65 42,69.65 48,69.65 48,75.65
PWR:
  pour cut-out: 53.65,14.218 54.3,14.868 54.3,16.768 53.85,17.218 52.15,17.218 51.95,17.018 51.95,16.718 51.95,14.618 52.35,14.218
Bottom Layer:
  pour cut-out: 16.739,66.297 16.5,66.059 16.5,14.704 15,13.204 15,10 17.23,10 17.23,13.23 17.75,13.75 17.75,66.227

## Silkscreen, mask and mechanical layers (free items; w line width, h text height)
Top Overlay:
  drawing of 59 lines, arcs and shapes, not listed
  text "DRV1 MODE" at 59.5,138.52 h1.67
  text "H" at 60.135,137.329 h1.67
  text "L" at 64.25,137.25 h1.67
  text "3V3" at 10.02,128.25 h1.67 r270
  text "0x17" at 17.02,128 h1.67 r270
  text "GND" at 10.02,123.75 h1.67 r270
  text "L2" at 0.745,117.63 h1.2
  text "L1" at 0.745,115.358 h1.2
  text "3V3" at 0.292,113.383 h1.2
  text "MXB" at 71.4,110.8 h1.5
  text "3V3" at 3,110.27 h1.67
  text "IO46" at 9.5,110.25 h1.2
  text "SDA" at 3,107.77 h1.67
  text "IO18" at 9.368,107.505 h1.2
  text "IO17" at 9.5,105.25 h1.2
  text "SCL" at 3.087,105.12 h1.67
  text "IO3" at 9.5,102.5 h1.2
  text "GND" at 3,102.27 h1.67
  text "3V3" at 3,97.77 h1.67
  text "RX" at 3,95.75 h1.67
  text "TX" at 3,92.25 h1.67
  text "GND" at 3,90.27 h1.67
  text "MXA" at 61.5,87 h1.5
  text "3V3" at 28.52,86.25 h1.67 r270
  text "CS1" at 24.77,83.75 h1.67 r270
  text "MISO" at 28.52,82.25 h1.67 r270
  text "3V5" at 35.3,79.468 h1.5
  text "SCK" at 24.77,79 h1.67 r270
  text "MOSI" at 28.52,76.75 h1.67 r270
  text "CS0" at 24.77,73.75 h1.67 r270
  text "GND" at 28.52,70 h1.67 r270
  text "SCL" at 19.5,65.513 h1.1
  text "SDA" at 20.75,62.513 h1.1
  text "EN" at 7.803,59.293 h1.52 r270
  text "BOOT" at 8.654,54.387 h1.52 r270
  text "(UN)LIMITED  / POWER" at 83.9,52.928 h2 r90
  text "GND" at 76.88,51.3 h1.67 r90
  text "REG2" at 3.515,49.588 h2 r270
  text "PWM" at 6,49.25 h2 r270
  text "G" at 0.808,46.379 h2 r270
  text "REG2" at 76.88,45.9 h1.67 r90
  text "7" at 8,43.75 h1.67 r270
  text "6" at 8.02,41.25 h1.67 r270
  text "GND" at 76.88,40.55 h1.67 r90
  text "5" at 8.02,38.75 h1.67 r270
  text "4" at 8,36.25 h1.67 r270
  text "REG1" at 76.88,35.8 h1.67 r90
  text "3" at 8.02,33.75 h1.67 r270
  text "2" at 8,31.25 h1.67 r270
  text "GND" at 76.88,30.8 h1.67 r90
  text "1" at 8,28.75 h1.67 r270
  text "VS" at 76.88,26.55 h1.67 r90
  text "0" at 8.98,25.25 h1.67 r90
  text "REG1" at 55.682,24.4 h1.5 r90
  text "REG2" at 31.682,23.9 h1.5 r90
  text "VUSB" at 29.9,11.318 h1.5
  text "5-20V" at 37.75,10.024 h2
  text "GND" at 43.25,10.024 h2
  text "XT60 5-20V" at 48.5,9.774 h2
  text "USB C" at 13.7,2.724 h2
  text "PD 20V 5A" at 8.063,2.275 h1.67
  text "L USB" at 24.286,0.9 h1.2 r90
Bottom Overlay:
  lines w0.1: 76.75,120.846 85.846,120.846 ; 76.75,120.846 76.75,130 85.846,130 85.846,120.846 ; 76.75,120.846 85.846,120.846 ; 76.75,120.846 76.75,111.75 85.846,111.75 85.846,120.846 ; 76.827,76.673 85.923,76.673 ; 76.827,76.673 76.827,85.25 85.923,85.25 85.923,76.673 ; 76.827,76.673 85.923,76.673 ; 76.827,76.673 76.827,67.827 85.923,67.827 85.923,76.673 ; 0.327,91.75 9.5,91.75 9.5,97.25 0.327,97.25 0.327,91.75 ; 14.577,132.577 53.923,132.577 53.923,139.923 14.577,139.923 14.577,132.577 ; 25.568,83.737 30.923,83.737 30.923,86.173 25.568,86.173 25.568,83.737 ; 25.577,65.577 30.93,65.577 30.93,71.089 25.577,71.089 25.577,65.577 ; 25.577,71.077 30.923,71.077 30.923,83.673 25.577,83.673 25.577,71.077 ; 66.577,81.827 76.423,81.827 76.423,88.5 66.577,88.5 66.577,81.827
  lines w0.15: 5.5,44.5 5.466,44.534 5.466,51.75 1,51.75 1,44.5 1.5,44.5 18.25,44.5 18.25,53 10.5,53 9.25,51.75 7.051,51.75 7.051,44.5 ; 12.65,51.213 13.494,51.213 13.494,44.506
  text "A4" at 37.875,137.475 h1.67
  text "A5" at 43.1,137.445 h1.67
  text "A0" at 18.2,137.42 h1.67
  text "A3" at 33.2,137.42 h1.67
  text "A1" at 23.2,137.4 h1.67
  text "A2" at 28.2,137.4 h1.67
  text "A6" at 47.925,137.395 h1.67
  text "A7" at 52.925,137.375 h1.67
  text "ANALOG-DIGITAL INPUTS     20V MAX" at 50.025,133.097 h2
  text "PA1" at 84,127 h1.67 r270
  text "H1" at 77.75,125.25 h1.67 r270
  text "PA2" at 84,122 h1.67 r270
  text "PB2" at 84,117 h1.67 r270
  text "H1" at 77.5,115.75 h1.67 r270
  text "F 3V5 1A" at 7.02,114.25 h1.67 r270
  text "PB1" at 84,112 h1.67 r270
  text "IO40" at 4.95,106.916 h1.3
  text "IO41" at 5,105.516 h1.3
  text "0x22" at 35.5,103.02 h1.67
  text "0x23" at 39,103.02 h1.67
  text "UART0" at 8.266,92.5 h1.3 r270
  text "DIGITAL POWER OUTPUTS 5-20V REGULATED OVERCURRENT PROTECTION" at 80.75,90.5 h1.5 r270
  text "DRV2 MODE" at 75.75,87.27 h1.67
  text "H" at 70.5,85.75 h1.67
  text "L" at 73.5,85.75 h1.67
  text "3V3" at 30.5,84.766 h1.3
  text "PC1" at 84.019,82.5 h1.67 r270
  text "IO14" at 30.5,82.266 h1.3
  text "IO13" at 30.5,79.766 h1.3
  text "H3" at 77.52,79.75 h1.67 r270
  text "PC2" at 84.019,78 h1.67 r270
  text "IO12" at 30.5,77 h1.3
  text "IO11" at 30.5,74.516 h1.3
  text "PD2" at 84,73.5 h1.67 r270
  text "IO10" at 30.5,72.016 h1.3
  text "H4" at 77.5,71.5 h1.67 r270
  text "PD1" at 84,68.5 h1.67 r270
  text "GND" at 30.526,68.453 h1.3
  text "3V5" at 10.335,48.125 h1.3 r270
  text "REG2 5.5V MAX!" at 10.422,44.729 h1.3 r270
  text "PWM EXPANDER" at 15.5,44.75 h1.67 r270
  text "0x70 OR 0x60" at 4.563,44.668 h1.2 r270
  text "runIT     Łukasz Gójski Jakub Howorus  Rev 1.0" at 86.037,9.75 h4.2
  text "F XT60 7A" at 58.636,8.043 h1.2 r270
  text "F ST 7A" at 39.014,6.5 h1.2 r270

## Text inside footprints (layer, text, board x,y; h text height)
D1: Top Component Outline "*" at 30.553,15.57 h1.27
D2: Top Component Outline "*" at 11.265,13.016 h1.27 r270
D6: Bottom Component Outline "*" at 8.834,114.135 h1.27 r180
D7: Top Component Outline "*" at 58.881,9.265 h1.27
D8: Bottom Component Outline "*" at 79.365,48.334 h1.27 r270
D9: Bottom Component Outline "*" at 79.365,28.781 h1.27 r270
D10: Bottom Component Outline "*" at 79.365,38.281 h1.27 r270
D19: Top Component Outline "*" at 20.822,28.187 h1.27 r90
D20: Top Component Outline "*" at 21.218,41.193 h1.27 r270
D21: Top Component Outline "*" at 13.197,106.587 h1.27 r90
D22: Bottom Component Outline "*" at 4.437,94.072 h1.27 r180
D23: Top Component Outline "*" at 10.3,59.378 h1.27
D24: Bottom Component Outline "*" at 23.678,74.8 h1.27 r270
D27: Bottom Component Outline "*" at 36.75,126.272 h1.27 r180
D28: Bottom Component Outline "*" at 24.625,126.372 h1.27 r180
U1: Top Component Outline "*" at 21.683,13.615 h1.27
U8: Bottom Component Outline "*" at 59.016,28.539 h1.27 r180
U10: Top Component Outline "*" at 15.685,50.184 h1.27 r90
U15: Top Component Outline "*" at 25.584,119.885 h1.27 r180
U16: Top Component Outline "*" at 41.665,110.534 h1.27 r270